# Altium PCB PCB.PcbDoc (part 2 of 2)
Units mm, origin at the board's own origin, x right, y up, seen from the top; angles counter-clockwise.
Board outline 59.56 x 122.05 mm, 4 copper layers (Top Layer, GND, POWER, Bottom Layer), stack 0.778 mm thick; 182 components, 168 nets, 567 pads, 302 vias.
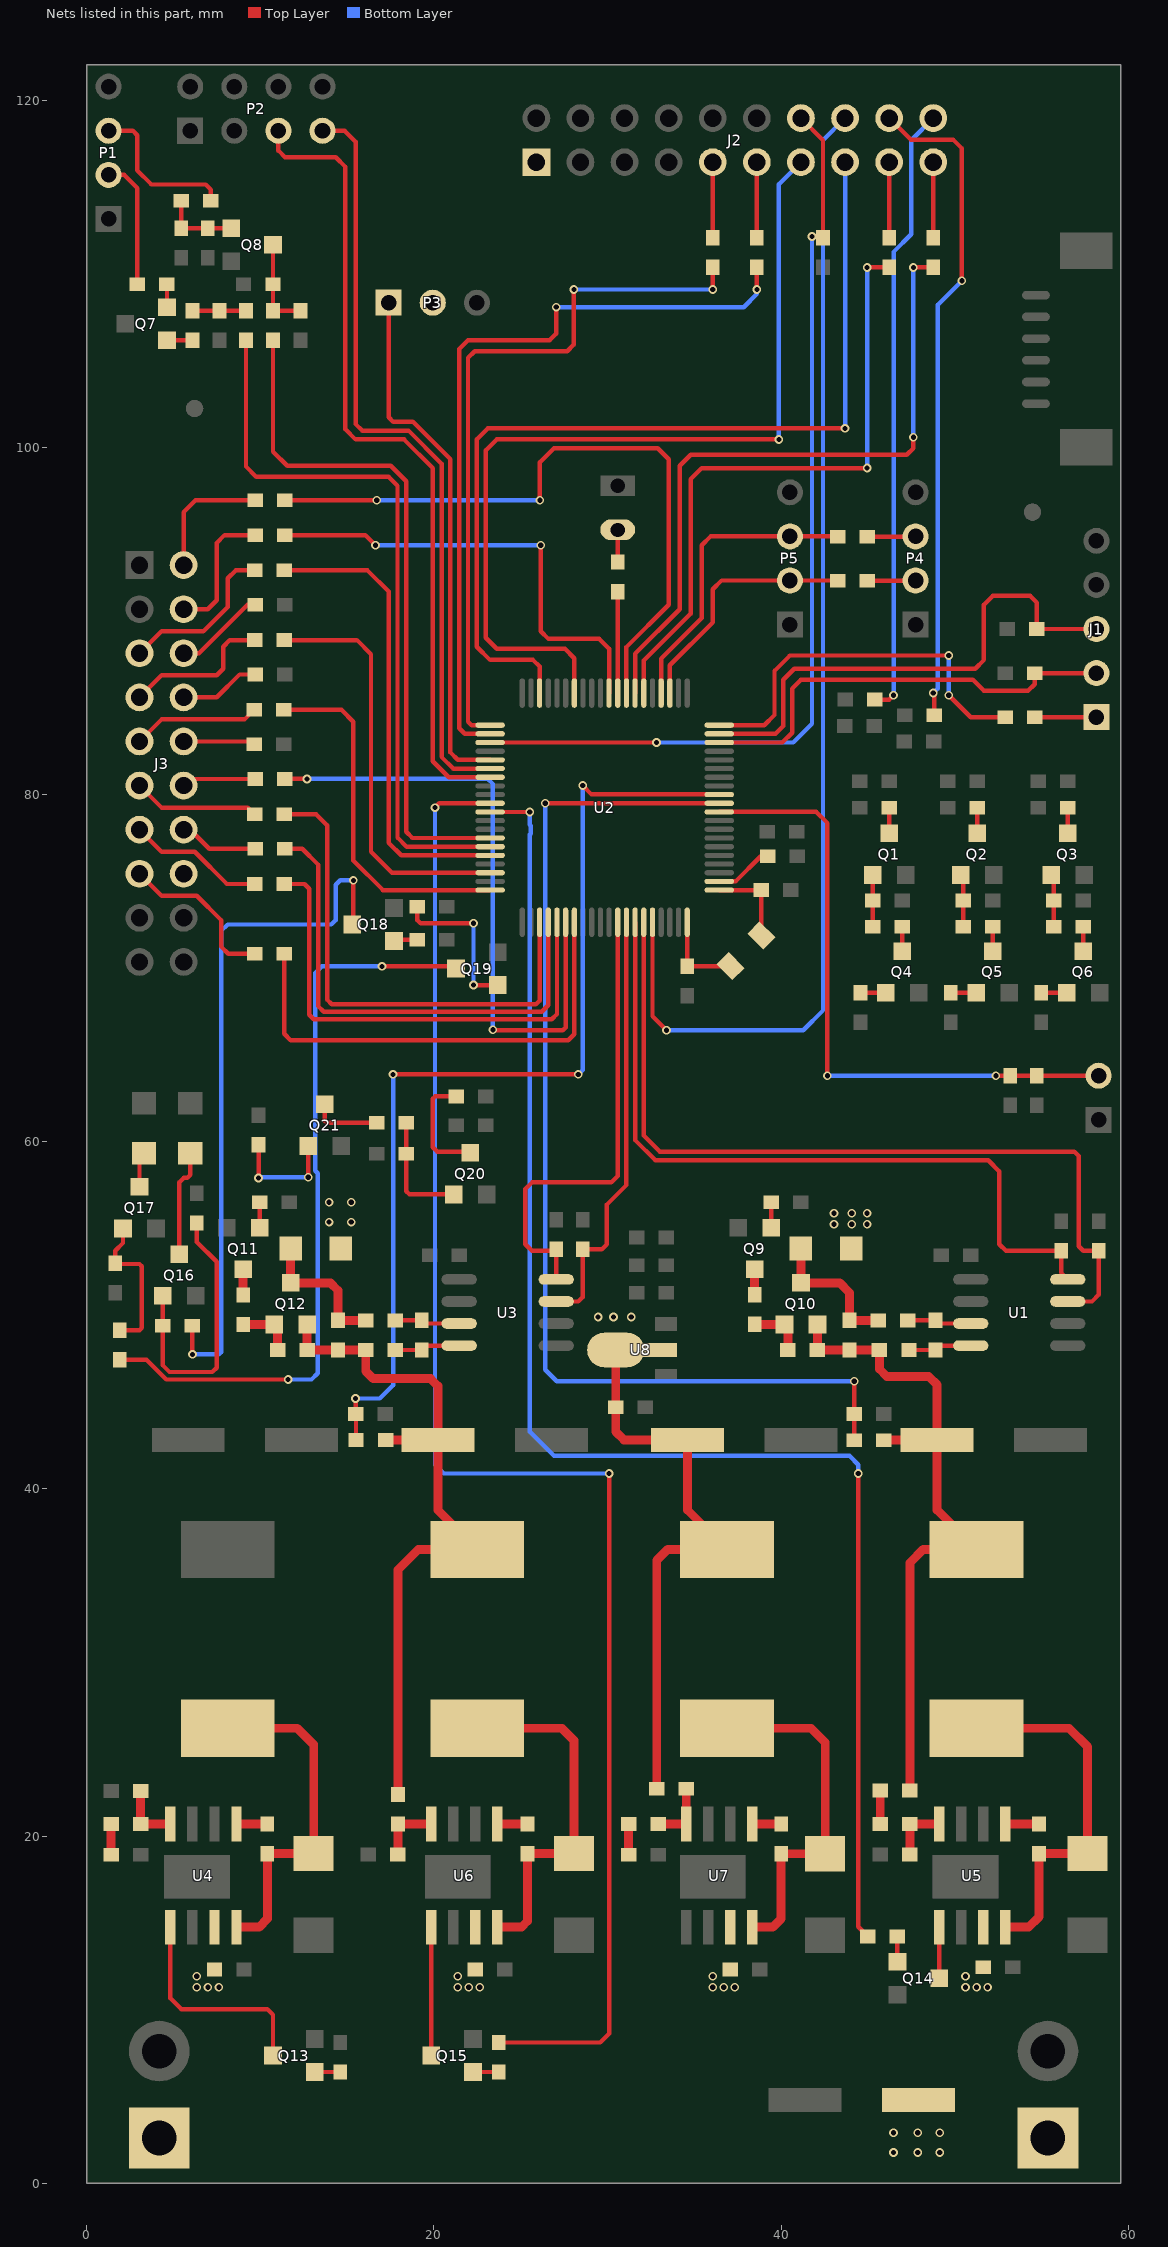
[diagram p4: the nets of this part, all layers, seen from the top]

## Via types
v1: diameter 0.5, hole 0.3, Top Layer to Bottom Layer, tented both sides, 290 vias
v2: diameter 0.813, hole 0.406, Top Layer to Bottom Layer, 12 vias

## Nets (pads, with @x,y where several pads share a name; then routed paths per layer and width w, separated by ;. In a path a pad name is that pad's centre, name@x,y a point inside that pad or via, vN(x,y) a via of type N, cw(c..) or ccw(c..) an arc to the next point about the centre after c; other vN are vias at no path point) (continued)
gongwei3: P2.5 U2.27 | length 47
  Top Layer w0.254: P2.5@11.049,118.237 11.049,117.094 11.43,116.713 14.351,116.713 14.91,116.154 14.91,101.041 15.494,100.457 18.288,100.457 19.939,98.806 19.939,81.915 20.856,80.998 U2.27@23.245,80.998
gongwei4: P2.7 U2.26 | length 44.3
  Top Layer w0.254: P2.7@13.589,118.237 14.859,118.237 15.494,117.602 15.494,101.346 15.875,100.965 18.542,100.965 20.447,99.06 20.447,82.169 21.118,81.498 U2.26@23.245,81.498
INA1_SCL: R22.2 U1.4 U2.54 | length 44
  Top Layer w0.254: U2.54@31.595,72.648 31.595,60.099 32.766,58.928 51.943,58.928 52.578,58.293 52.578,54.102 52.959,53.721 R22.2@56.134,53.721 56.134,52.451 U1.4@56.515,52.07
INA1_SDA: R23.2 U1.3 U2.55 | length 48.8
  Top Layer w0.254: U2.55@32.095,72.648 32.095,60.361 33.02,59.436 56.896,59.436 57.15,59.182 57.15,53.975 57.404,53.721 R23.2@58.293,53.721 58.293,51.181 57.912,50.8 U1.3@56.515,50.8
INA2_SCL: R42.2 U2.52 U3.4 | length 27
  Top Layer w0.254: U3.4@27.051,52.07 27.051,53.721 25.654,53.721 25.273,54.102 25.273,57.277 25.654,57.658 30.226,57.658 30.595,58.027 U2.52@30.595,72.648
INA2_SDA: R46.2 U2.53 U3.3 | length 24.9
  Top Layer w0.254: U3.3@27.051,50.8 28.321,50.8 28.575,51.054 R46.2@28.575,53.797 29.667,53.797 29.972,54.102 29.972,56.388 31.095,57.511 U2.53@31.095,72.648
IO4: R52.2 U2.44 | length 28.8
  Top Layer w0.254: R52.2@11.405,76.881 12.422,76.881 13.335,75.969 13.335,67.818 13.665,67.488 26.213,67.488 26.595,67.87 U2.44@26.595,72.648
IO5: R50.2 U2.46 | length 36.6
  Top Layer w0.254: R50.2@11.405,80.895 11.408,80.899 v1(12.7,80.899) ; v1(23.404,66.457) 23.44,66.421 27.432,66.421 27.595,66.584 U2.46@27.595,72.648
  Bottom Layer w0.254: v1(12.7,80.899) 23.114,80.899 23.404,80.609 v1(23.404,66.457)
IO11: R49.1 U2.45 | length 28.6
  Top Layer w0.254: R49.1@11.379,74.849 12.573,74.849 12.573,74.831 12.827,74.577 12.827,67.31 13.081,67.056 26.797,67.056 27.095,67.354 U2.45@27.095,72.648
IO12: R51.1 U2.47 | length 28.1
  Top Layer w0.254: R51.1@11.379,70.835 11.379,66.218 11.76,65.837 27.43,65.837 27.44,65.848 27.748,65.848 28.095,66.195 U2.47@28.095,72.648
IR_R: C1.1 Q8.3 R10.2 R31.2 | length 5.4
  Top Layer w0.254: Q8.3@10.738,111.671 R10.2@10.738,109.385 R31.2@10.738,107.874 C1.1@12.319,107.874
IR_T: R18.1 R19.1 R30.2 | length 3.1
  Top Layer w0.254: R19.1@6.096,107.874 R18.1@7.652,107.874 R30.2@9.182,107.874
KEY_OPEN: R38.2 U2.8 | length 39.4
  Top Layer w0.254: R38.2@11.405,96.952 v1(16.713,96.952) ; v1(26.111,96.952) 26.111,99.136 26.924,99.949 32.893,99.949 33.528,99.314 33.528,90.932 31.095,88.499 U2.8@31.095,85.848
  Bottom Layer w0.254: v1(16.713,96.952) v1(26.111,96.952)
KEY_OPEN1: R39.2 U2.10 | length 26.9
  Top Layer w0.254: R39.2@11.405,94.945 16.053,94.945 v1(16.637,94.361) ; v1(26.162,94.361) 26.162,89.408 26.607,88.963 29.527,88.963 30.095,88.396 U2.10@30.095,85.848
  Bottom Layer w0.254: v1(16.637,94.361) v1(26.162,94.361)
LED: R68.1 U2.9 | length 5.8
  Top Layer w0.254: U2.9@30.595,85.848 R68.1@30.595,91.694
LED_IRQ_CTL: J2.16 U2.56 | length 68
  Top Layer w0.254: U2.56@32.595,72.648 32.595,67.227 v1(33.401,66.421)
  Bottom Layer w0.254: v1(33.401,66.421) 41.275,66.421 42.418,67.564 42.418,117.697 J2.16@43.688,118.967
LED_TEST_Diode: P6.2 R88.2 R89.2 U2.70 | length 36.7
  Top Layer w0.254: U2.70@36.445,78.998 42.033,78.998 42.672,78.359 v1(42.672,63.805) ; v1(52.375,63.805) R89.2@53.213,63.805 R88.2@54.737,63.805 P6.2@58.293,63.805
  Bottom Layer w0.254: v1(42.672,63.805) v1(52.375,63.805)
MOTO_B: J2.18 R21.2 | length 38.3
  Top Layer w0.254: J2.18@46.228,118.967 47.466,117.729 49.911,117.729 50.419,117.221 v1(50.419,109.601) ; v1(48.768,85.852) 48.819,85.801 R21.2@48.819,84.565
  Bottom Layer w0.254: v1(48.768,85.852) 49.022,86.106 49.022,108.204 v1(50.419,109.601)
MOTO_R: J2.20 R20.2 | length 35.4
  Top Layer w0.254: R20.2@45.39,85.471 46.228,85.471 v1(46.482,85.725)
  Bottom Layer w0.254: v1(46.482,85.725) 46.482,111.252 47.498,112.268 47.498,117.697 J2.20@48.768,118.967
NB_PWRKEY: J2.15 U2.18 | length 54.4
  Top Layer w0.254: U2.18@26.095,85.848 26.095,87.376 25.714,87.757 23.241,87.757 22.479,88.519 22.479,100.457 23.114,101.092 v1(43.688,101.092)
  Bottom Layer w0.254: v1(43.688,101.092) J2.15@43.688,116.427
NB_RST: J2.13 U2.14 | length 52
  Top Layer w0.254: U2.14@28.095,85.848 28.095,87.856 27.559,88.392 23.622,88.392 22.987,89.027 22.987,99.822 23.622,100.457 v1(39.878,100.457)
  Bottom Layer w0.254: v1(39.878,100.457) 39.878,115.157 J2.13@41.148,116.427
NB_RXD: J2.11 R62.2 | length 4.4
  Top Layer w0.254: R62.2@38.608,112.065 J2.11@38.608,116.427
NB_TXD: J2.9 R61.2 | length 4.4
  Top Layer w0.254: R61.2@36.068,112.065 J2.9@36.068,116.427
NetC3_1: C3.1 Q8.1 R24.1 R29.2 | length 4.5
  Top Layer w0.254: R24.1@5.461,114.211 R29.2@5.461,112.621 C3.1@6.985,112.621 Q8.1@8.338,112.621
NetC4_1: C4.1 R27.2 U1.7 | length 3.7
  Top Layer w0.254: R27.2@47.295,49.708 C4.1@48.895,49.708 49.073,49.53 U1.7@50.927,49.53
NetC4_2: C4.2 R35.2 U1.8 | length 3.7
  Top Layer w0.254: R35.2@47.371,48.006 C4.2@48.895,48.006 49.149,48.26 U1.8@50.927,48.26
NetC8_1: C8.1 U2.62 | length 3.4
  Top Layer w0.254: U2.62@36.445,74.998 37.383,74.998 38.839,76.454 C8.1@39.231,76.454
NetC9_1: C9.1 R54.2 U3.7 | length 3.8
  Top Layer w0.254: R54.2@17.78,49.708 C9.1@19.304,49.708 19.482,49.53 U3.7@21.463,49.53
NetC9_2: C9.2 R64.2 U3.8 | length 3.8
  Top Layer w0.254: R64.2@17.78,48.006 C9.2@19.304,48.006 19.558,48.26 U3.8@21.463,48.26
NetC11_1: C11.1 D4.2 L1.1 U4.8 | length 20
  Top Layer w0.508: L1.1@8.128,26.219 12.135,26.219 13.081,25.273 D4.2@13.081,18.999 C11.1@10.414,18.999 10.414,15.24 9.935,14.761 U4.8@8.636,14.761
NetC11_2: C11.2 U4.1 | length 1.8
  Top Layer w0.508: U4.1@8.636,20.701 C11.2@10.414,20.701
NetC14_1: C14.1 D5.2 L2.1 U5.8 | length 21.6
  Top Layer w0.508: L2.1@51.266,26.219 56.585,26.219 57.658,25.146 D5.2@57.658,18.999 C14.1@54.864,18.999 54.864,15.367 54.258,14.761 U5.8@52.917,14.761
NetC14_2: C14.2 U5.1 | length 1.9
  Top Layer w0.508: U5.1@52.917,20.701 C14.2@54.864,20.701
NetC17_1: C17.1 D6.2 L3.1 U6.8 | length 20.8
  Top Layer w0.508: L3.1@22.507,26.219 27.375,26.219 28.067,25.527 D6.2@28.067,18.999 C17.1@25.4,18.999 25.4,15.113 25.048,14.761 U6.8@23.664,14.761
NetC17_2: C17.2 U6.1 | length 1.7
  Top Layer w0.508: U6.1@23.664,20.701 C17.2@25.4,20.701
NetC20_1: C20.1 D7.2 L4.1 U7.8 | length 20.6
  Top Layer w0.508: L4.1@36.886,26.219 41.726,26.219 42.545,25.4 D7.2@42.545,18.986 40.018,18.986 C20.1@40.005,18.999 40.005,15.24 39.526,14.761 U7.8@38.354,14.761
NetC20_2: C20.2 U7.1 | length 1.7
  Top Layer w0.508: U7.1@38.354,20.701 C20.2@40.005,20.701
NetD1_1: D1.1 Q10.3 R27.1 R33.2 | length 8.3
  Top Layer w0.508: D1.1@41.148,53.848 Q10.3@41.148,51.873 43.377,51.873 43.942,51.308 R33.2@43.942,49.708 R27.1@45.593,49.708
NetD2_1: D2.1 Q12.3 R54.1 R60.2 | length 8.2
  Top Layer w0.508: D2.1@11.75,53.848 Q12.3@11.75,51.873 14.04,51.873 14.478,51.435 R60.2@14.478,49.708 R54.1@16.078,49.708
NetD3_2: D3.2 R68.2 | length 1.9
  Top Layer w0.254: R68.2@30.595,93.396 D3.2@30.595,95.25
NetD8_1: D8.1 Q16.3 | length 6.2
  Top Layer w0.254: Q16.3@5.334,53.524 5.334,57.658 5.592,57.916 5.795,57.916 5.969,58.09 D8.1@5.969,59.33
NetD9_1: D9.1 Q17.3 | length 2
  Top Layer w0.254: Q17.3@3.048,57.404 D9.1@3.048,59.076
  Top Layer w0.762: D9.1@3.048,59.076 D9.1@3.302,59.33
NetJ1_1: J1.1 R36.2 | length 3.6
  Top Layer w0.254: R36.2@54.61,84.455 J1.1@58.166,84.455
NetJ3_2: J3.2 R38.1 | length 7.4
  Top Layer w0.254: J3.2@5.588,93.218 5.588,96.266 6.274,96.952 R38.1@9.703,96.952
NetJ3_4: J3.4 R39.1 | length 7.8
  Top Layer w0.254: J3.4@5.588,90.678 6.985,90.678 7.493,91.186 7.493,94.488 7.95,94.945 R39.1@9.703,94.945
NetJ3_5: J3.5 R58.2 | length 9.6
  Top Layer w0.254: J3.5@3.048,88.138 4.318,89.408 6.731,89.408 8.128,90.805 8.128,92.456 8.584,92.912 R58.2@9.677,92.912
NetJ3_6: J3.6 R41.1 | length 5.3
  Top Layer w0.254: J3.6@5.588,88.138 6.477,88.138 9.27,90.931 R41.1@9.703,90.931
NetJ3_7: J3.7 R40.2 | length 8.7
  Top Layer w0.254: J3.7@3.048,85.598 4.318,86.868 7.493,86.868 7.874,87.249 7.874,88.519 8.253,88.898 R40.2@9.677,88.898
NetJ3_8: J3.8 R45.1 | length 4.7
  Top Layer w0.254: J3.8@5.588,85.598 7.493,85.598 8.811,86.916 R45.1@9.703,86.916
NetJ3_9: J3.9 R44.2 | length 7.4
  Top Layer w0.254: J3.9@3.048,83.058 4.318,84.328 9.096,84.328 R44.2@9.652,84.884
NetJ3_10: J3.10 R48.1 | length 4.1
  Top Layer w0.254: J3.10@5.588,83.058 9.496,83.058 R48.1@9.652,82.902
NetJ3_11: J3.11 R47.2 | length 7.3
  Top Layer w0.254: J3.11@3.048,80.518 4.318,79.248 9.292,79.248 R47.2@9.677,78.863
NetJ3_12: J3.12 R50.1 | length 4.3
  Top Layer w0.254: J3.12@5.588,80.518 5.965,80.895 R50.1@9.703,80.895
NetJ3_13: J3.13 R49.2 | length 7.9
  Top Layer w0.254: J3.13@3.048,77.978 4.318,76.708 6.223,76.708 8.082,74.849 R49.2@9.677,74.849
NetJ3_14: J3.14 R52.1 | length 4.6
  Top Layer w0.254: J3.14@5.588,77.978 5.969,77.978 7.066,76.881 R52.1@9.703,76.881
NetJ3_15: J3.15 R51.2 | length 9.4
  Top Layer w0.254: J3.15@3.048,75.438 4.318,74.168 6.35,74.168 7.747,72.771 7.747,71.247 8.159,70.835 R51.2@9.677,70.835
NetP1_2: P1.2 R17.2 | length 7.5
  Top Layer w0.254: P1.2@1.27,115.697 2.159,115.697 2.927,114.929 R17.2@2.927,109.385
NetP1_3: P1.3 R24.2 | length 9.1
  Top Layer w0.254: P1.3@1.27,118.237 2.667,118.237 2.921,117.983 2.921,115.951 3.734,115.138 6.858,115.138 7.163,114.833 R24.2@7.163,114.211
NetP4_2: P4.2 R69.1 | length 2.8
  Top Layer w0.254: R69.1@44.958,92.316 47.739,92.316 P4.2@47.752,92.329
NetP4_3: P4.3 R67.1 | length 2.8
  Top Layer w0.254: R67.1@44.958,94.856 47.739,94.856 P4.3@47.752,94.869
NetQ1_1: Q1.1 R1.1 R7.1 | length 3
  Top Layer w0.254: Q1.1@45.278,75.368 45.288,75.358 R1.1@45.288,73.901 R7.1@45.288,72.377
NetQ1_3: Q1.3 R3.1 | length 1.5
  Top Layer w0.254: Q1.3@46.228,77.768 R3.1@46.228,79.235
NetQ2_1: Q2.1 R2.1 R8.1 | length 3
  Top Layer w0.254: Q2.1@50.358,75.368 50.495,75.231 R2.1@50.495,73.901 R8.1@50.495,72.377
NetQ2_3: Q2.3 R4.1 | length 1.5
  Top Layer w0.254: Q2.3@51.308,77.768 R4.1@51.308,79.235
NetQ3_1: Q3.1 R5.1 R9.1 | length 3
  Top Layer w0.254: Q3.1@55.565,75.368 55.702,75.231 R5.1@55.702,73.901 R9.1@55.702,72.377
NetQ3_3: Q3.3 R6.1 | length 1.5
  Top Layer w0.254: Q3.3@56.515,77.768 R6.1@56.515,79.235
NetQ4_1: Q4.1 R14.2 | length 1.5
  Top Layer w0.254: R14.2@44.577,68.58 Q4.1@46.04,68.58
NetQ4_3: Q4.3 R7.2 | length 1.4
  Top Layer w0.254: Q4.3@46.99,70.98 R7.2@46.99,72.377
NetQ5_1: Q5.1 R15.2 | length 1.5
  Top Layer w0.254: R15.2@49.784,68.58 Q5.1@51.247,68.58
NetQ5_3: Q5.3 R8.2 | length 1.4
  Top Layer w0.254: Q5.3@52.197,70.98 R8.2@52.197,72.377
NetQ6_1: Q6.1 R16.2 | length 1.5
  Top Layer w0.254: R16.2@54.991,68.58 Q6.1@56.454,68.58
NetQ6_3: Q6.3 R9.2 | length 1.4
  Top Layer w0.254: Q6.3@57.404,70.98 R9.2@57.404,72.377
NetQ7_1: Q7.1 R19.2 | length 1.5
  Top Layer w0.254: Q7.1@4.629,106.172 R19.2@6.096,106.172
NetQ7_2: Q7.2 R17.1 | length 1.3
  Top Layer w0.254: Q7.2@4.629,108.072 R17.1@4.629,109.385
NetQ9_1: Q9.1 R32.1 | length 1.5
  Top Layer w0.254: Q9.1@39.431,55.048 R32.1@39.431,56.515
NetQ9_3: Q9.3 R28.2 | length 1.5
  Top Layer w0.508: R28.2@38.481,51.181 Q9.3@38.481,52.648
NetQ10_1: Q10.1 R28.1 R34.1 | length 3.3
  Top Layer w0.508: R28.1@38.481,49.479 38.487,49.473 Q10.1@40.198,49.473 40.396,49.275 R34.1@40.396,48.006
NetQ11_1: Q11.1 R59.1 | length 1.5
  Top Layer w0.254: Q11.1@9.967,55.048 R59.1@9.967,56.515
NetQ11_3: Q11.3 R55.2 | length 1.5
  Top Layer w0.508: R55.2@9.017,51.175 Q11.3@9.017,52.648
NetQ12_1: Q12.1 R55.1 R63.1 | length 3.3
  Top Layer w0.508: R55.1@9.017,49.473 Q12.1@10.8,49.473 10.998,49.275 R63.1@10.998,48.006
NetQ13_1: Q13.1 R70.2 | length 1.5
  Top Layer w0.254: Q13.1@13.138,6.416 R70.2@14.605,6.416
NetQ13_3: Q13.3 U4.5 | length 12.7
  Top Layer w0.254: U4.5@4.826,14.761 4.826,10.668 5.461,10.033 10.414,10.033 10.738,9.709 Q13.3@10.738,7.366
NetQ14_1: Q14.1 R75.2 | length 1.5
  Top Layer w0.254: Q14.1@46.707,12.761 R75.2@46.707,14.224
NetQ14_3: Q14.3 U5.5 | length 3
  Top Layer w0.254: Q14.3@49.107,11.811 U5.5@49.107,14.761
NetQ15_1: Q15.1 R81.2 | length 1.5
  Top Layer w0.254: Q15.1@22.254,6.416 R81.2@23.749,6.416
NetQ15_3: Q15.3 U6.5 | length 7.4
  Top Layer w0.254: Q15.3@19.854,7.366 U6.5@19.854,14.761
NetQ16_1: Q16.1 R53.2 R90.2 | length 16.2
  Top Layer w0.254: Q16.1@4.384,51.124 4.384,49.413 R90.2@4.394,49.403 4.394,47.116 4.774,46.736 7.239,46.736 7.493,46.99 7.493,53.086 6.35,54.229 R53.2@6.35,55.321
NetQ17_1: Q17.1 R57.2 R91.2 | length 8.7
  Top Layer w0.254: R91.2@1.905,49.149 3.048,49.149 3.175,49.276 3.175,52.832 3.048,52.959 1.702,52.959 R57.2@1.651,53.01 1.651,53.721 2.098,54.168 Q17.1@2.098,55.004
NetQ18_1: Q18.1 R92.2 | length 1.4
  Top Layer w0.254: Q18.1@17.71,71.567 17.771,71.628 R92.2@19.05,71.628
NetQ18_3: Q18.3 R90.1 | length 40.1
  Top Layer w0.254: v1@6.096,47.879 R90.1@6.096,49.403 ; Q18.3@15.31,72.517 15.367,72.574 v1(15.367,75.057)
  Bottom Layer w0.254: v1(6.096,47.752) 7.62,47.752 7.747,47.879 7.747,72.136 8.128,72.517 14.097,72.517 14.351,72.771 14.351,74.803 14.605,75.057 v1(15.367,75.057)
NetQ19_1: Q19.1 R93.2 | length 9
  Top Layer w0.254: R93.2@19.05,73.533 19.05,72.771 19.238,72.583 v1(22.286,72.583) ; v1(22.286,69.027) Q19.1@23.679,69.027
  Bottom Layer w0.254: v1(22.286,69.027) v1(22.286,72.583)
NetQ19_3: Q19.3 R91.1 | length 43.5
  Top Layer w0.254: R91.1@1.905,47.447 3.452,47.447 4.595,46.304 v1(11.608,46.304) ; v1(17.018,70.104) 21.152,70.104 Q19.3@21.279,69.977
  Bottom Layer w0.254: v1(11.608,46.304) 12.954,46.304 13.321,46.671 13.321,58.189 13.174,58.336 13.174,69.723 13.555,70.104 v1(17.018,70.104)
NetQ20_1: Q20.1 R94.1 R96.1 | length 6.7
  Top Layer w0.254: R96.1@18.415,61.087 R94.1@18.415,59.309 18.415,57.15 18.599,56.966 Q20.1@21.148,56.966
NetQ20_3: Q20.3 R95.1 | length 6.5
  Top Layer w0.254: R95.1@21.285,62.611 20.066,62.611 19.939,62.484 19.939,59.69 20.193,59.436 22.028,59.436 Q20.3@22.098,59.366
NetQ21_1: Q21.1 R98.2 | length 6.5
  Top Layer w0.254: v1(9.906,57.912) R98.2@9.906,59.817 ; v1(12.766,57.959) Q21.1@12.766,59.76
  Bottom Layer w0.254: v1@9.929,57.959 v1(12.766,57.959)
NetQ21_3: Q21.3 R96.2 | length 4
  Top Layer w0.254: Q21.3@13.716,62.16 13.716,61.214 13.843,61.087 R96.2@16.713,61.087
NetR71_2: R71.2 R72.1 | length 1.8
  Top Layer w0.508: R71.2@1.409,18.923 R72.1@1.409,20.701
NetR72_2: R72.2 R73.1 U4.4 | length 3.6
  Top Layer w0.508: R73.1@3.111,22.606 R72.2@3.111,20.701 U4.4@4.826,20.701
NetR77_2: R77.2 R78.1 U5.4 | length 3.4
  Top Layer w0.508: R77.2@47.422,18.948 R78.1@47.422,20.701 U5.4@49.107,20.701
NetR78_2: R78.2 R79.1 | length 1.9
  Top Layer w0.508: R78.2@45.72,20.701 R79.1@45.72,22.631
NetR82_2: R82.2 R83.1 U6.4 | length 3.7
  Top Layer w0.508: R82.2@17.932,18.948 R83.1@17.932,20.701 U6.4@19.854,20.701
NetR85_2: R85.2 R86.1 | length 1.8
  Top Layer w0.508: R85.2@31.217,18.923 R86.1@31.217,20.701
NetR86_2: R86.2 R87.2 U7.4 | length 3.7
  Top Layer w0.508: R86.2@32.918,20.701 U7.4@34.544,20.701 R87.2@34.544,22.733
PGND: R47.1 U2.43 | length 29.7
  Top Layer w0.254: R47.1@11.379,78.863 13.22,78.863 13.851,78.232 13.851,68.191 14.122,67.92 25.883,67.92 26.095,68.132 U2.43@26.095,72.648
PWM: P3.1 U2.25 | length 30.5
  Top Layer w0.254: P3.1@17.399,108.331 17.399,101.727 17.653,101.473 18.796,101.473 20.955,99.314 20.955,82.423 21.38,81.998 U2.25@23.245,81.998
RST_FM: R36.1 U2.80 | length 22.4
  Top Layer w0.254: U2.80@36.445,83.998 39.04,83.998 39.624,84.582 39.624,87.122 40.513,88.011 v1(49.657,88.011) ; v1(49.657,85.725) 50.927,84.455 R36.1@52.908,84.455
  Bottom Layer w0.254: v1(49.657,85.725) v1(49.657,88.011)
S+: R44.1 U2.40 | length 20.9
  Top Layer w0.254: R44.1@11.354,84.884 14.684,84.884 15.367,84.201 15.367,76.2 17.069,74.498 U2.40@23.245,74.498
SWCLK_FM: J1.2 R37.2 U2.78 | length 25.8
  Top Layer w0.254: U2.78@36.445,82.998 40.072,82.998 40.64,83.566 40.64,86.106 41.148,86.614 51.054,86.614 51.689,85.979 54.229,85.979 54.61,86.36 R37.2@54.61,86.995 J1.2@58.166,86.995
SWDIO_FM: J1.3 R43.2 U2.79 | length 30.1
  Top Layer w0.254: U2.79@36.445,83.498 39.683,83.498 40.132,83.947 40.132,86.614 40.767,87.249 51.181,87.249 51.689,87.757 51.689,90.932 52.197,91.44 54.356,91.44 54.737,91.059 R43.2@54.737,89.535 J1.3@58.166,89.535
TP4: R58.1 U2.36 | length 27.1
  Top Layer w0.254: R58.1@11.379,92.912 16.181,92.912 17.399,91.694 17.399,77.216 18.117,76.498 U2.36@23.245,76.498
TP5: R40.1 U2.38 | length 24.1
  Top Layer w0.254: R40.1@11.379,88.898 15.572,88.898 16.383,88.087 16.383,76.708 17.593,75.498 U2.38@23.245,75.498
UART0_RXD: P5.2 R69.2 U2.3 | length 14.4
  Top Layer w0.254: U2.3@33.595,85.848 33.595,87.443 36.068,89.916 36.068,91.821 36.576,92.329 P5.2@40.513,92.329 43.243,92.329 R69.2@43.256,92.316
UART0_TXD: P5.3 R67.2 U2.4 | length 17.5
  Top Layer w0.254: U2.4@33.095,85.848 33.095,87.832 35.433,90.17 35.433,94.361 35.941,94.869 P5.3@40.513,94.869 43.243,94.869 R67.2@43.256,94.856
UART1_RXD: R31.1 U2.34 | length 40
  Top Layer w0.254: R31.1@10.738,106.172 10.738,99.752 11.557,98.933 17.526,98.933 18.415,98.044 18.415,77.851 18.768,77.498 U2.34@23.245,77.498
UART1_TXD: R30.1 U2.35 | length 42.3
  Top Layer w0.254: R30.1@9.182,106.172 9.182,98.895 9.779,98.298 17.399,98.298 17.907,97.79 17.907,77.522 18.431,76.998 U2.35@23.245,76.998
UART3_RXD: R61.1 U2.21 | length 41.2
  Top Layer w0.254: U2.21@23.245,83.998 22.174,83.998 21.971,84.201 21.971,105.156 22.352,105.537 27.686,105.537 28.067,105.918 v1(28.067,109.093) ; v1(36.068,109.093) R61.1@36.068,110.363
  Bottom Layer w0.254: v1(28.067,109.093) v1(36.068,109.093)
UART3_TXD: R62.1 U2.22 | length 44.6
  Top Layer w0.254: U2.22@23.245,83.498 21.785,83.498 21.463,83.82 21.463,105.664 21.971,106.172 26.67,106.172 27.051,106.553 v1(27.051,108.077) ; v1(38.608,109.093) R62.1@38.608,110.363
  Bottom Layer w0.254: v1(27.051,108.077) 37.846,108.077 38.608,108.839 v1(38.608,109.093)
UART4_RXD: R65.1 U2.6 | length 36.7
  Top Layer w0.254: U2.6@32.095,85.848 32.095,87.721 34.798,90.424 34.798,98.171 35.433,98.806 v1(44.958,98.806) ; v1(44.958,110.363) R65.1@46.228,110.363
  Bottom Layer w0.254: v1(44.958,98.806) v1(44.958,110.363)
UART4_TXD: R66.1 U2.7 | length 39.6
  Top Layer w0.254: U2.7@31.595,85.848 31.595,88.11 34.163,90.678 34.163,98.933 34.798,99.568 47.244,99.568 47.625,99.949 v1(47.625,100.584) ; v1(47.625,110.363) R66.1@48.768,110.363
  Bottom Layer w0.254: v1(47.625,100.584) v1(47.625,110.363)
UMU_RXD: J2.19 R66.2 | length 4.4
  Top Layer w0.254: R66.2@48.768,112.065 J2.19@48.768,116.427
UMU_TXD: J2.17 R65.2 | length 4.4
  Top Layer w0.254: R65.2@46.228,112.065 J2.17@46.228,116.427
UMU_WAKE: J2.14 R56.2 U2.23 | length 55.1
  Top Layer w0.254: U2.23@23.245,82.998 v1(32.826,82.998) ; J2.14@41.148,118.967 42.418,117.697 R56.2@42.418,112.065 42.342,112.141 v1(41.783,112.141)
  Bottom Layer w0.254: v1(32.826,82.998) 40.707,82.998 41.783,84.074 v1(41.783,112.141)
VIN_5V: C24.1 C26.1 L4.2 P3.2 R87.1 U8.2 | length 33.7
  Top Layer w0.508: U8.2@30.48,48.006 C24.1@30.48,44.704 30.48,43.307 30.963,42.824 C26.1@34.614,42.824 34.614,38.792 L4.2@36.886,36.519 33.471,36.519 32.842,35.89 R87.1@32.842,22.733
  other v1: 29.464,49.911 30.353,49.911 31.369,49.911
VIN_24V: C12.1 C15.1 C18.1 C21.1 C22.1 JP1.1 JP2.1 U4.7 U5.7 U6.7 U7.7
  other v1: 46.482,1.778 47.879,1.778 49.149,1.778 46.482,2.921 47.879,2.921 49.149,2.921 6.35,11.303 6.985,11.303 7.62,11.303 21.378,11.303 22.013,11.303 22.648,11.303 36.068,11.303 36.703,11.303 37.338,11.303 50.631,11.303 51.266,11.303 51.901,11.303 6.35,11.938 21.378,11.938 36.068,11.938 50.631,11.938
Vout_3V6: C19.1 L3.2 Q12.2 R60.1 R63.2 R64.1 R80.2 R83.2 | length 41.9
  Top Layer w0.508: Q12.2@12.7,49.473 R63.2@12.7,48.006 R60.1@14.478,48.006 R64.1@16.078,48.006 16.078,46.787 16.51,46.355 19.812,46.355 20.235,45.932 C19.1@20.235,42.824 ; R80.2@17.221,42.824 C19.1@20.235,42.824 ; R83.2@17.932,22.403 17.932,35.331 19.12,36.519 L3.2@22.507,36.519 20.235,38.792 C19.1@20.235,42.824
Vout_3V6_1: D2.2 J3.16
  other v1: 13.97,55.372 15.24,55.372 13.97,56.515 15.24,56.515
Vout_3V6_CHK: R80.1 R84.2 U2.72 | length 58.3
  Top Layer w0.254: v1(15.494,45.212) R84.2@15.494,44.323 15.519,44.298 R80.1@15.519,42.824 ; v1(17.653,63.881) v1(28.321,63.881) ; v1(28.575,80.518) 29.083,80.01 36.433,80.01 U2.72@36.445,79.998
  Bottom Layer w0.254: v1(15.494,45.212) 16.891,45.212 17.653,45.974 v1(17.653,63.881) ; v1(28.321,63.881) 28.575,64.135 v1(28.575,80.518)
Vout_3V6_CTL: R81.1 U2.30 | length 90.2
  Top Layer w0.254: v1(20.066,79.248) 20.316,79.498 U2.30@23.245,79.498 ; R81.1@23.749,8.118 29.581,8.118 30.099,8.636 v1(30.099,40.894)
  Bottom Layer w0.254: v1(20.066,79.248) 20.066,41.402 20.574,40.894 v1(30.099,40.894)
Vout_7V2: C16.1 L2.2 Q10.2 R33.1 R34.2 R35.1 R74.2 R79.2 | length 40.6
  Top Layer w0.508: Q10.2@42.098,49.473 R34.2@42.098,48.006 R33.1@43.942,48.006 R35.1@45.669,48.006 45.669,46.914 46.101,46.482 48.514,46.482 48.993,46.003 C16.1@48.993,42.824 ; R74.2@45.923,42.799 45.949,42.824 C16.1@48.993,42.824 ; R79.2@47.422,22.631 47.422,35.738 48.203,36.519 L2.2@51.266,36.519 48.993,38.792 C16.1@48.993,42.824
Vout_7V2_1: D1.2 J2.1
  other v1: 43.053,55.245 44.069,55.245 44.958,55.245 43.053,55.88 44.069,55.88 44.958,55.88
Vout_7V2_CHK: R74.1 R76.2 U2.71 | length 64.2
  Top Layer w0.254: v1(26.416,79.502) 36.441,79.502 U2.71@36.445,79.498 ; R74.1@44.221,42.799 R76.2@44.221,44.323 v1(44.221,46.203)
  Bottom Layer w0.254: v1(26.416,79.502) 26.416,46.863 27.076,46.203 v1(44.221,46.203)
Vout_7V2_CTL: R75.1 U2.31 | length 85.1
  Top Layer w0.254: U2.31@23.245,78.998 23.249,78.994 v1(25.527,78.994) ; v1(44.45,40.894) 44.45,14.779 R75.1@45.005,14.224
  Bottom Layer w0.254: v1(25.527,78.994) 25.527,78.255 25.574,78.208 25.574,77.748 25.527,77.701 25.527,43.307 26.924,41.91 43.942,41.91 44.45,41.402 v1(44.45,40.894)
XT1: C5.1 U2.61 Y1.1 | length 5
  Top Layer w0.254: U2.61@36.445,74.498 C5.1@38.862,74.498 Y1.1@38.862,71.882
XT2: C6.2 U2.60 Y1.2 | length 5
  Top Layer w0.254: U2.60@34.595,72.648 C6.2@34.595,70.114 Y1.2@37.094,70.114
pads on no net: MARK1.0 MARK1.1 MARK2.0 MARK2.1 P4.4 P5.4 P7.7 P7.8 U2.1 U2.2 U2.5 U2.11 U2.12 U2.13 U2.17 U2.19 U2.20 U2.24 U2.58 U2.59 U2.67 U2.68 U2.69 U4.2 U4.3 U5.2 U5.3 U6.2 U6.3 U7.2 U7.3 U7.5

## Polygon pours and split planes (outlines as drawn)
VIN_24V on Top Layer "24V" (solid, remove dead copper, pour order 0): 6.858,15.748 6.858,13.208 6.096,12.446 6.096,10.795 6.223,10.668 8.001,10.668 8.255,10.922 8.255,13.208 7.874,13.589 7.874,15.748
VIN_24V on Top Layer "24V" (solid, remove dead copper, pour order 4): 21.886,15.748 21.886,13.208 21.124,12.446 21.124,10.795 21.251,10.668 23.029,10.668 23.283,10.922 23.283,13.208 22.902,13.589 22.902,15.748
VIN_24V on Top Layer "24V" (solid, remove dead copper, pour order 6): 36.576,15.748 36.576,13.208 35.814,12.446 35.814,10.795 35.941,10.668 37.719,10.668 37.973,10.922 37.973,13.208 37.592,13.589 37.592,15.748
VIN_24V on Top Layer "24V" (solid, remove dead copper, pour order 8): 51.139,15.748 51.139,13.208 50.377,12.446 50.377,10.795 50.504,10.668 52.282,10.668 52.536,10.922 52.536,13.208 52.155,13.589 52.155,15.748
VIN_24V on Top Layer "24V" (solid, remove dead copper, pour order 10): 45.72,5.461 45.72,0.889 57.658,0.889 57.658,5.461
12V on Top Layer "12V" (solid, remove dead copper, pour order 12): 0.762,22.098 2.159,22.098 2.159,24.638 0.762,24.638
Vout_3V6_1 on Top Layer "3V6_1" (solid, remove dead copper, pour order 16): 13.462,53.086 13.462,57.277 15.875,57.277 15.875,53.086
12V on Top Layer "12V" (solid, remove dead copper, pour order 20): 10.795,34.798 1.524,34.798 1.524,45.72 8.128,45.72 8.128,39.37 10.795,39.37
VIN_5V on Top Layer "5V" (solid, remove dead copper, pour order 26): 28.956,47.117 32.004,47.117 32.004,50.292 31.877,50.419 28.956,50.419
Vout_7V2_1 on Top Layer "7V2_1" (solid, remove dead copper, pour order 28): 42.672,52.959 45.339,52.959 45.466,53.086 45.466,56.261 42.672,56.261
3.3V on Top Layer "3V3" (solid, remove dead copper, pour order 30): 32.766,53.975 35.052,53.975 35.306,54.229 35.306,56.515 32.766,56.515
GND on Top Layer "GND" (solid, remove dead copper, pour order 38): 0,122.047 59.563,122.047 59.563,0 0,0
GND on Bottom Layer "GND" (solid, remove dead copper, pour order 40): 0,122.047 59.563,122.047 59.563,0 0,0
GND on GND (split plane): 59.053,0.51 0.51,0.51 0.51,121.537 59.053,121.537
Vout_7V2_1 on POWER (split plane): 27.303,114.046 27.311,113.971 27.332,113.899 27.368,113.833 27.415,113.775 38.86,102.33 38.86,86.233 38.868,86.158 38.889,86.086 38.925,86.02 38.972,85.962 39.03,85.915 39.096,85.879 39.168,85.858 39.243,85.85 46.734,85.85 46.734,64.135 46.734,52.707 41.785,52.707 41.785,55.372 41.785,83.312 41.777,83.387 41.756,83.459 41.72,83.525 41.673,83.583 41.615,83.63 41.549,83.666 41.477,83.687 41.402,83.695 36.959,83.695 36.959,101.092 36.951,101.167 36.93,101.239 36.894,101.305 36.847,101.363 24.513,113.697 24.513,117.316 24.543,117.346 27.303,117.346
Vout_3V6_1 on POWER (split plane): 17.969,54.167 13.654,54.167 13.654,74.295 13.648,74.345 13.628,74.391 13.598,74.431 13.558,74.461 13.512,74.481 13.462,74.487 4.637,74.487 4.637,76.516 17.969,76.516
VIN_5V on POWER (split plane): 21.461,99.441 21.469,99.366 21.49,99.294 21.526,99.228 21.573,99.17 21.631,99.123 21.697,99.087 21.769,99.066 21.844,99.058 24.763,99.058 24.763,52.578 24.771,52.503 24.792,52.431 24.828,52.365 24.875,52.307 25.129,52.053 25.187,52.006 25.253,51.97 25.325,51.949 25.4,51.941 31.748,51.941 31.748,49.659 22.608,49.659 22.608,96.52 22.6,96.595 22.579,96.667 22.543,96.733 22.496,96.791 22.438,96.838 22.372,96.874 22.3,96.895 22.225,96.903 18.163,96.903 18.163,109.472 21.461,109.472
3.3V on POWER (split plane): 59.053,14.607 9.019,14.607 9.019,49.782 12.7,49.782 12.775,49.79 12.847,49.811 12.913,49.847 12.971,49.894 13.018,49.952 13.054,50.018 13.075,50.09 13.083,50.165 13.083,58.928 13.075,59.003 13.054,59.075 13.018,59.141 12.971,59.199 12.913,59.246 12.847,59.282 12.775,59.303 12.7,59.311 8.665,59.311 8.653,59.326 8.595,59.373 8.529,59.409 8.457,59.43 8.382,59.438 0.51,59.438 0.51,121.537 59.053,121.537
12V on POWER (split plane): 8.111,58.657 8.169,58.61 8.235,58.574 8.307,58.553 8.382,58.545 12.317,58.545 12.317,50.548 8.763,50.548 8.7,50.542 8.636,50.548 8.561,50.54 8.489,50.519 8.423,50.483 8.365,50.436 8.318,50.378 8.282,50.312 8.261,50.24 8.253,50.165 8.253,14.607 0.51,14.607 0.51,58.672 8.099,58.672
VIN_24V on POWER (split plane): 59.053,0.51 0.51,0.51 0.51,13.841 59.053,13.841

## Keep-outs
Keep-Out Layer:
  lines w0.127: 59.563,-5 59.563,0 ; 59.563,127.047 59.563,122.047 ; 119.126,-5 119.126,0 ; 119.126,127.047 119.126,122.047 ; 178.689,-5 178.689,0 ; 178.689,127.047 178.689,122.047 ; 0,0 0,122.047 ; 0,0 59.563,0 ; 0,0 0,-5 238.252,-5 238.252,0 ; 0,122.047 59.563,122.047 ; 0,122.047 0,127.047 238.252,127.047 238.252,122.047 ; 59.563,0 59.563,122.047 ; 59.563,0 119.126,0 ; 59.563,0 59.563,122.047 ; 59.563,122.047 119.126,122.047 ; 119.126,0 119.126,122.047 ; 119.126,0 178.689,0 ; 119.126,0 119.126,122.047 ; 119.126,122.047 178.689,122.047 ; 178.689,0 178.689,122.047 ; 178.689,0 238.252,0 ; 178.689,0 178.689,122.047 ; 178.689,122.047 238.252,122.047 ; 238.252,0 238.252,122.047

## Other copper
POWER (plane layer: these items are gaps in the copper):
  lines w0.381: 4.445,74.295 13.462,74.295 13.462,53.975 18.161,53.975 18.161,76.708 4.445,76.708 4.445,74.295
  lines w0.762: 0.254,59.055 5.334,59.055 8.382,59.055 8.382,58.928 12.7,58.928 12.7,50.165 8.763,50.165 ; 8.636,14.224 8.636,50.165 ; 59.563,14.986 59.563,0 ; 59.563,0 0,0 0,14.224 59.436,14.224 59.563,14.351 59.563,0 ; 17.78,96.52 17.78,109.855 21.844,109.855 21.844,99.441 25.146,99.441 25.146,52.578 25.4,52.324 32.004,52.324 32.131,52.197 32.131,49.276 28.702,49.276 22.225,49.276 22.225,96.52 17.78,96.52 ; 24.13,113.538 24.13,117.475 24.384,117.729 27.686,117.729 27.686,114.046 39.243,102.489 39.243,86.233 47.117,86.233 47.117,64.135 47.117,52.324 42.418,52.324 41.402,52.324 41.402,55.372 41.402,83.312 36.576,83.312 36.576,101.092 24.13,113.538

## Silkscreen, mask and mechanical layers (free items; w line width, h text height)
Top Overlay:
  text "IR-" at 2.667,120.269 h0.76
  text "IR+" at 2.667,117.729 h0.76
  text "gw1" at 5.207,115.951 h0.76
  text "gw2" at 7.747,115.951 h0.76
  text "gw3" at 10.287,115.951 h0.76
  text "gw4" at 12.827,115.951 h0.76
  text "IF-" at 2.667,115.189 h0.76
  text "IF+" at 2.667,112.649 h0.76
  text "Main" at 27.559,111.252 h1.27
  text "MOTOR" at 18.288,109.982 h1.27
  text "PWM" at 16.383,106.045 h0.76
  text "5V" at 19.304,106.045 h0.76
  text "GND" at 21.463,106.045 h0.76
  text "CARD" at 53.213,103.378 h1.27 r90
  text "TXD" at 38.735,93.98 h0.76 r90
  text "VCC" at 56.642,93.599 h0.76 r90
  text "RXD" at 38.735,91.44 h0.76 r90
  text "GND" at 56.642,91.059 h0.76 r90
  text "PC_UART" at 37.084,89.662 h1.27 r90
  text "GND" at 38.735,88.9 h0.76 r90
  text "DIO" at 56.642,88.519 h0.76 r90
  text "CLK" at 56.642,85.979 h0.76 r90
  text "RST" at 56.642,83.439 h0.76 r90
  text "Reserve" at 15.875,77.556 h1.27 r90
  text "D-" at 56.642,63.246 h0.76 r90
  text "D+" at 56.642,60.579 h0.76 r90
  text "LED_CHK" at 50.165,58.42 h1.27
  text "12V" at 9.271,22.86 h1.27
  text "3V6" at 23.622,22.86 h1.27
  text "5V" at 37.973,22.86 h1.27
  text "7.2or6V" at 49.276,22.86 h1.27
  text "GND" at 8.763,8.636 h0.76 r270
  text "GND" at 50.8,6.604 h0.76 r90
  text "24V+" at 8.763,3.843 h0.76 r270
  text "<--------  Current" at 13.589,2.286 h1.27
  text "24V+" at 50.8,1.397 h0.76 r90